# Altium PCB 3S2P-6V.PcbDoc
Units mm, origin at the board's own origin, x right, y up, seen from the top; angles counter-clockwise.
Board outline 74.99 x 72.5 mm, 2 copper layers (Top Layer, Bottom Layer); 8 components, 8 nets, 24 pads, 0 vias.
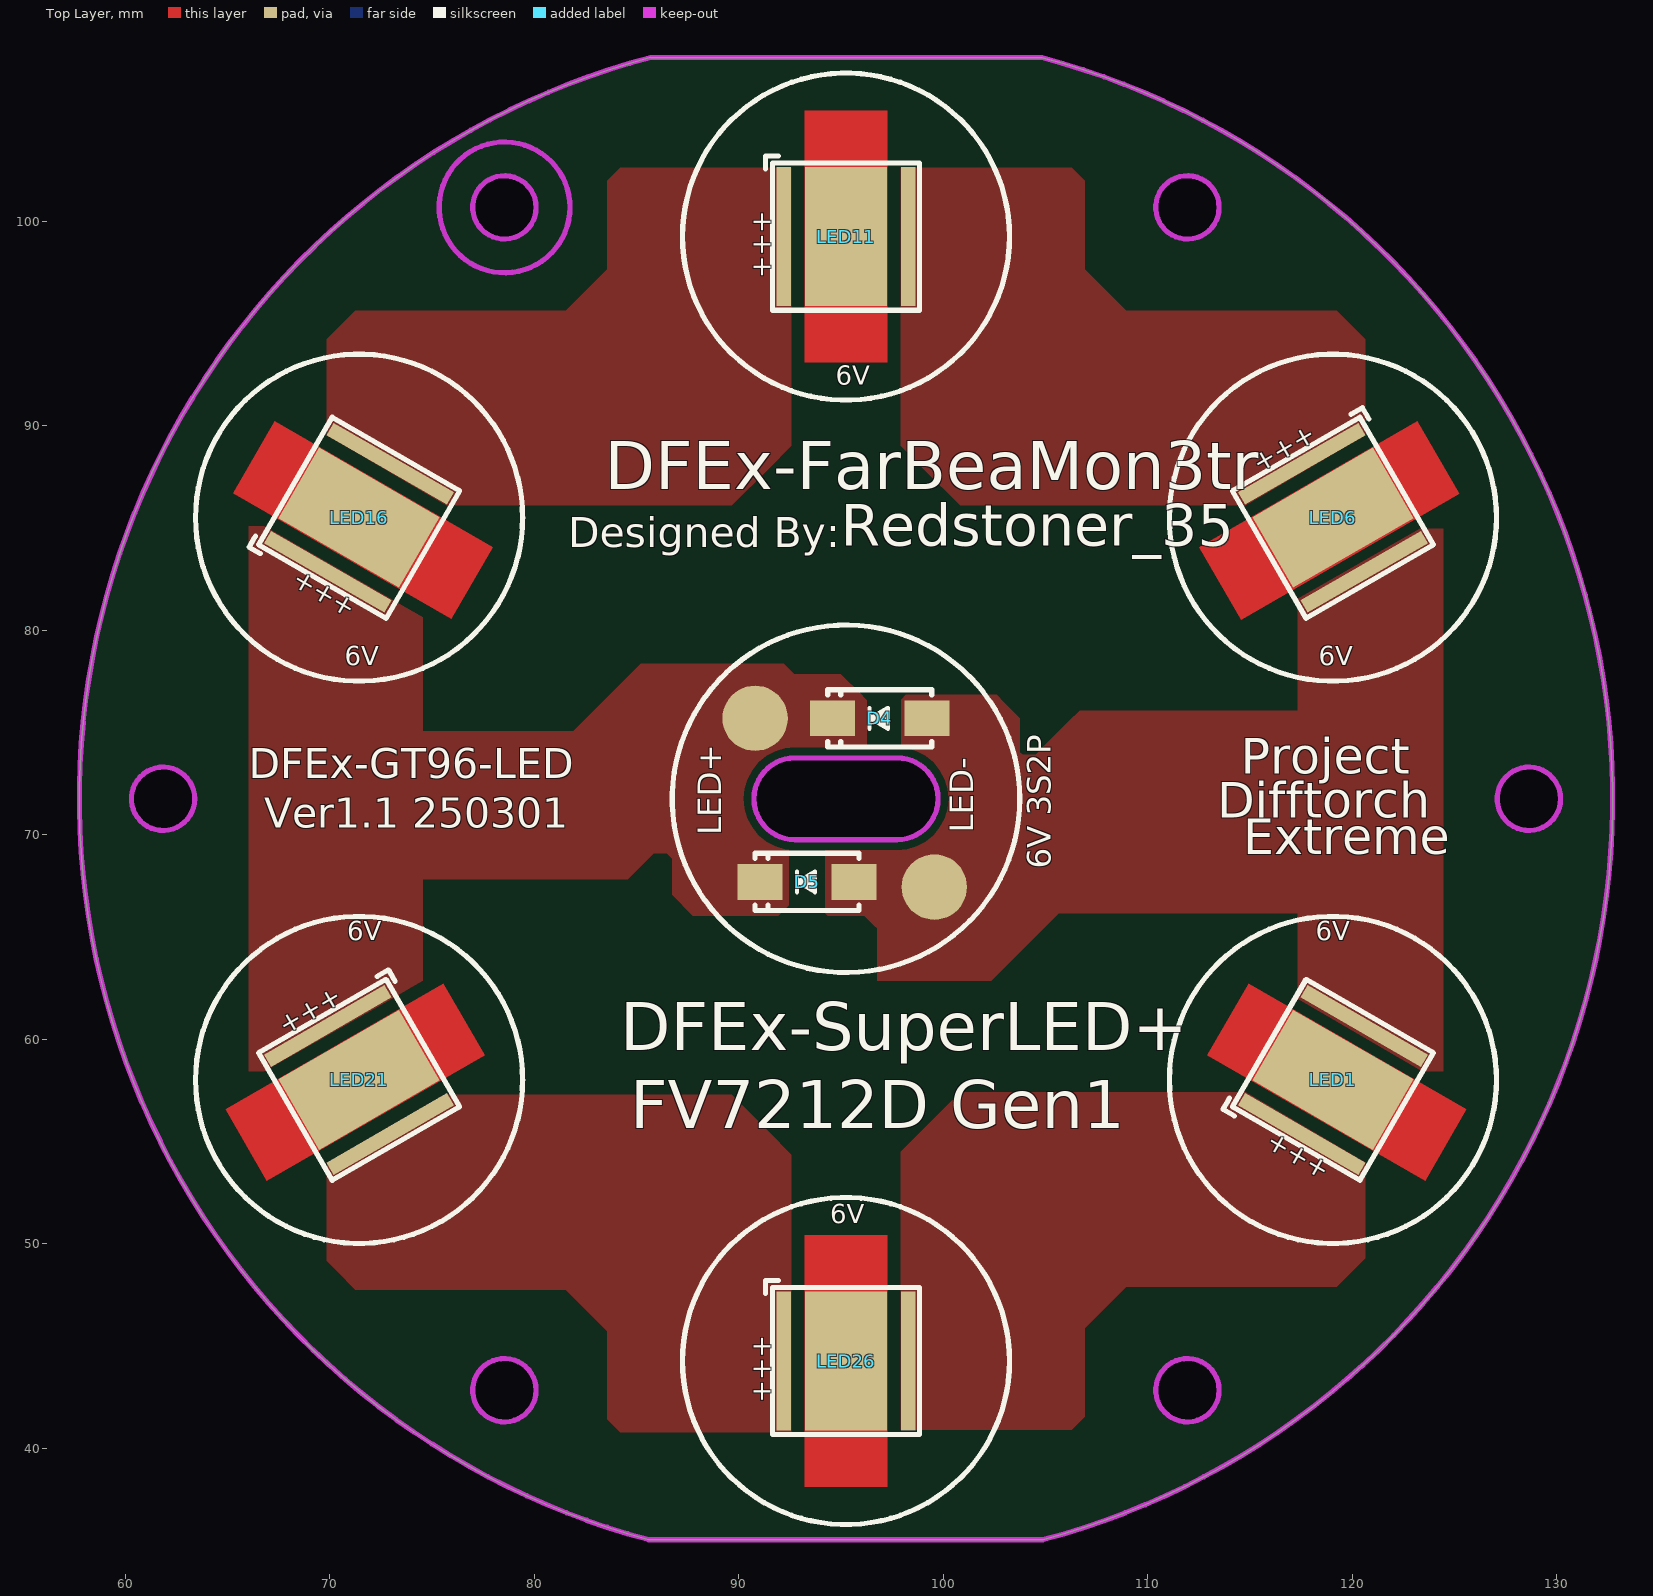
[diagram p0: Top Layer view]
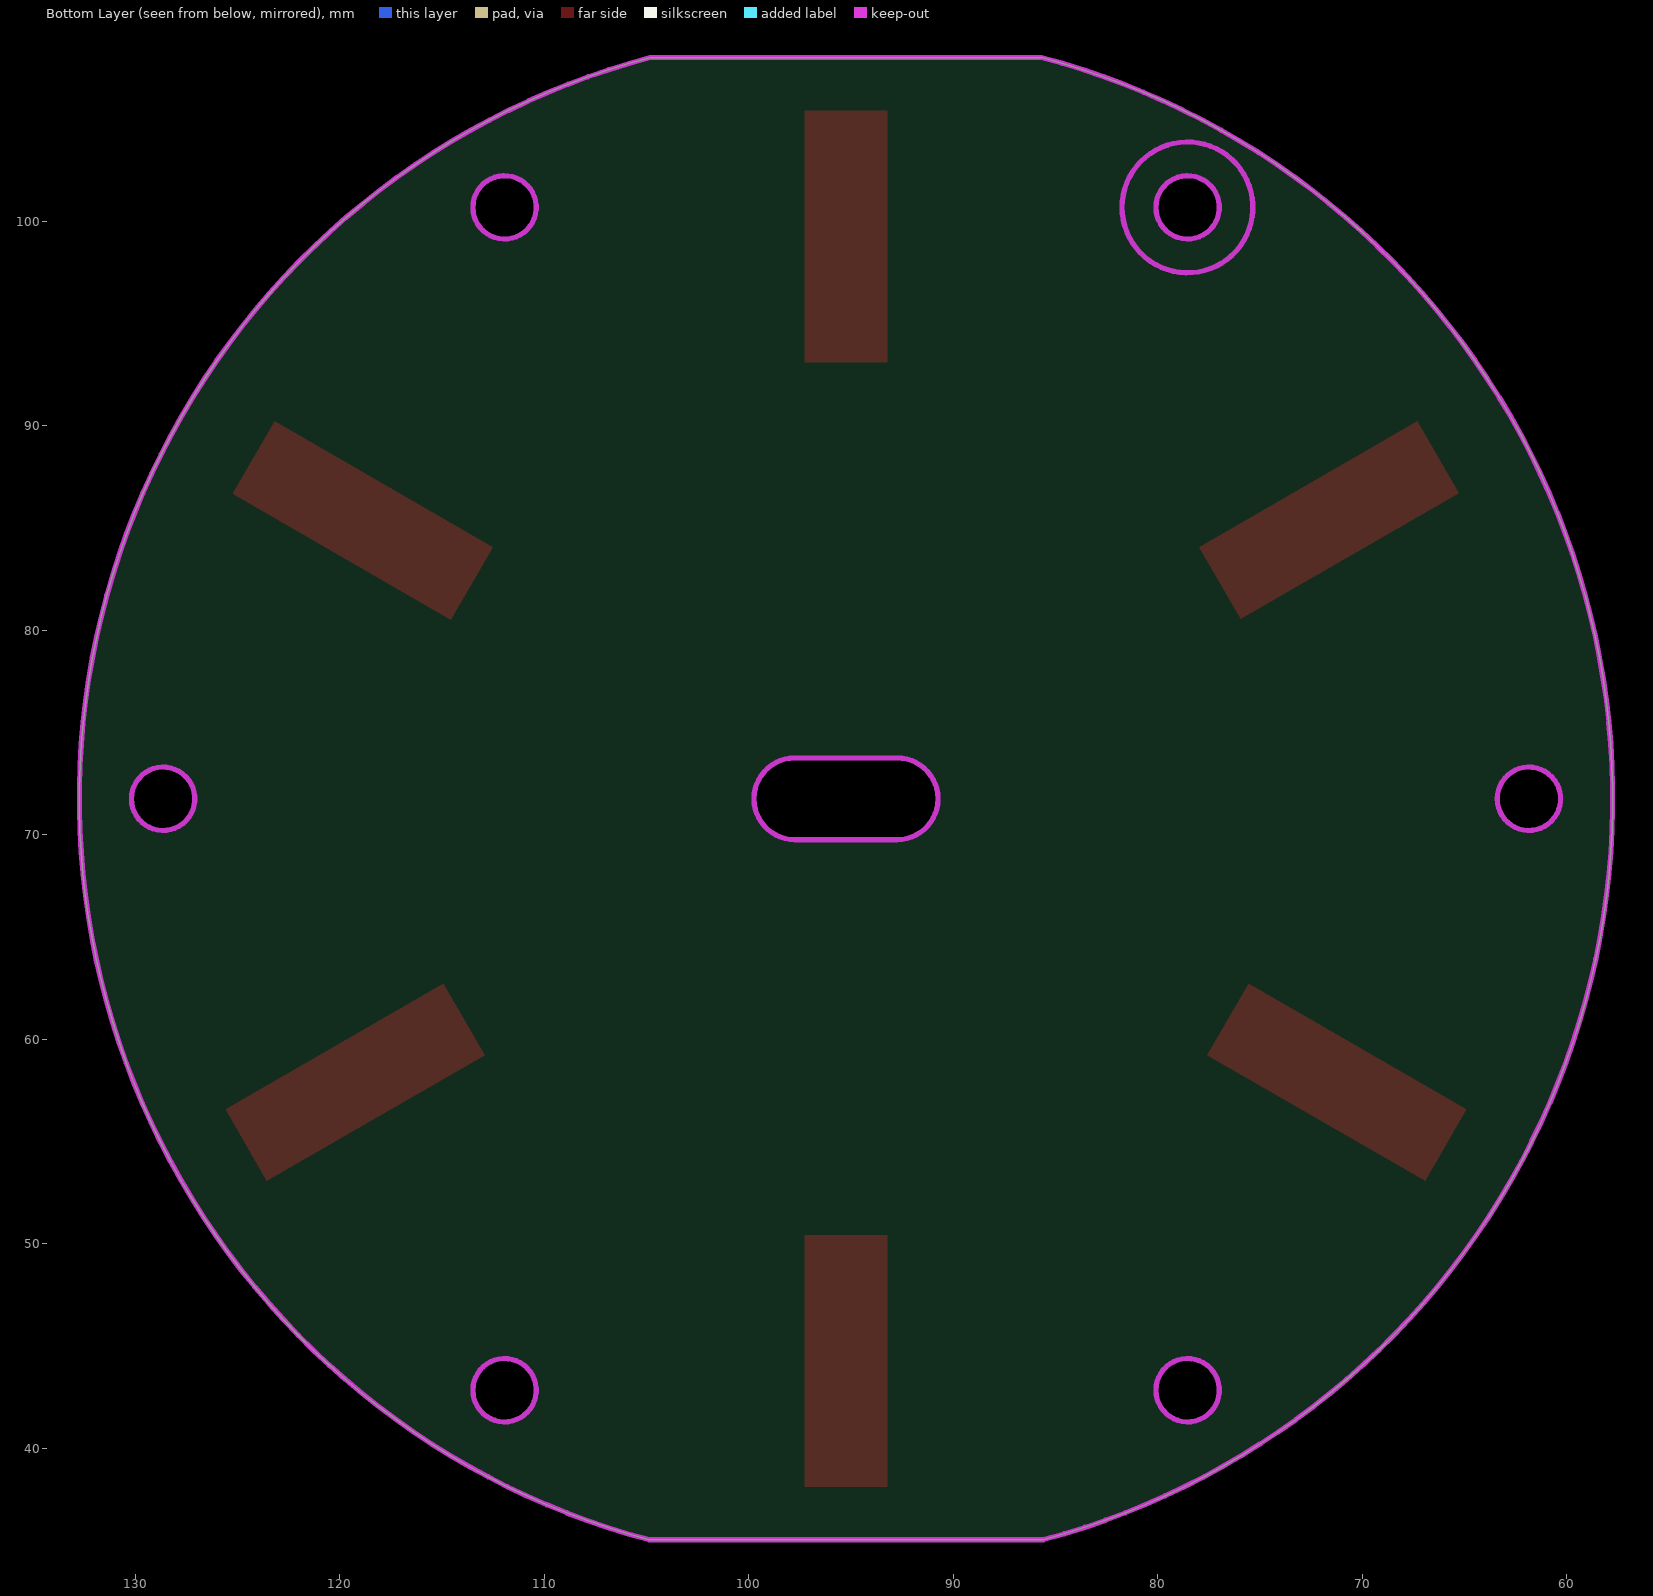
[diagram p1: Bottom Layer view, seen from below]

## Layer stack, top to bottom
Top Solder: solder mask 0.0102, Solder Resist, Dk 3.5
Top Layer: signal copper 0.0356
Dielectric 1: dielectric 0.32, FR-4, Dk 4.8
Bottom Layer: signal copper 0.0356
Bottom Solder: solder mask 0.0102, Solder Resist, Dk 3.5

## Board outline
85.597,35.519 cw(c95.25,71.755) 85.7,108.019 85.7,108.01 104.832,108.01 cw(c95.25,71.755) 104.888,35.515
cut-out: 76.999,42.828 cw(c78.549,42.828) 78.549,44.378 cw(c78.549,42.828) 80.099,42.828 cw(c78.549,42.828) 78.549,41.278 cw(c78.549,42.828)
cut-out: 110.401,42.828 ccw(c111.951,42.828) 111.951,41.278 ccw(c111.951,42.828) 113.501,42.828 ccw(c111.951,42.828) 111.951,44.378 ccw(c111.951,42.828)
cut-out: 127.102,71.755 ccw(c128.652,71.755) 128.652,70.205 ccw(c128.652,71.755) 130.202,71.755 ccw(c128.652,71.755) 128.652,73.305 ccw(c128.652,71.755)
cut-out: 110.401,100.682 ccw(c111.951,100.682) 111.951,99.132 ccw(c111.951,100.682) 113.501,100.682 ccw(c111.951,100.682) 111.951,102.232 ccw(c111.951,100.682)
cut-out: 78.549,99.132 cw(c78.549,100.682) 76.999,100.682 cw(c78.549,100.682) 78.549,102.232 cw(c78.549,100.682) 80.099,100.682 cw(c78.549,100.682)
cut-out: 61.848,70.205 cw(c61.848,71.755) 60.298,71.755 cw(c61.848,71.755) 61.848,73.305 cw(c61.848,71.755) 63.398,71.755 cw(c61.848,71.755)
cut-out: 92.75,69.755 97.75,69.755 ccw(c97.75,71.755) 97.75,73.755 92.75,73.755 ccw(c92.75,71.755)

## Design rules (kind name [scope] priority, off if disabled: settings)
Clearance [All] p1: gap=0.381
PolygonConnect [All] p1: connectstyle=Direct reliefconductorwidth=0.254 reliefentries=4 polygonreliefangle="90 Angle" airgapwidth=0.254
RoutingVias [All] p1: holewidth=0.711 width=1.27 viastyle="Through Hole" minholewidth=0.711 minwidth=1.27 maxholewidth=0.711 maxwidth=1.27
SolderMaskExpansion [All] p1: expansion=0.102
Width [All] p1: maxlimit=0.254 minlimit=0.254 preferedwidth=0.254
30 further rules are at their usual default settings.

## Components (designator, comment, footprint, x,y, rotation, side; value= is the part's Value field where it differs from the comment)
D4 "SB2060L" SMA 96.901,75.692 r180 top
D5 "SB2060L" SMA 93.345,67.691 r180 top
LED1 "FV7012I" XHP70.3HI 119.066,58.005 r240 top
LED6 "FV7012I" XHP70.3HI 119.066,85.505 r120 top
LED11 "FV7012I" XHP70.3HI 95.25,99.255 r180 top locked
LED16 "FV7012I" XHP70.3HI 71.434,85.505 r240 top locked
LED21 "FV7012I" XHP70.3HI 71.434,58.005 r120 top
LED26 "FV7012I" XHP70.3HI 95.25,44.255 r180 top locked

## Footprints (in the part's own frame and the unit in brackets; to place one, negate y for a bottom-side part, rotate by r counter-clockwise, add the part's x,y. Pads: shape width x height; smd on the part's side, far side on the other; paste and mask are expansions set on the pad)
SMA [mm] "4.5x2.6*2.2mm（长宽高，不包括引脚）"
  rect 2.2x1.75 smd: 1(-2.3,0) 2(2.3,0)
  silkscreen extent -2.54,-1.4 2.54,1.4, body extent -2.53,-1.3 2.58,1.3, height 2.15
XHP70.3HI [mm] "第三代CREE XHP70 LED，平头HI版本"
  rect 4x6.8 smd mask+0.03: 0(0,0)
  rect 0.7x6.8 smd mask+0.03: 1(-3.05,0) 2(3.05,0)
  silkscreen extent -3.6,-3.94 3.94,3.6

## Free pads (board coordinates)
  round 3.2 smd mask+0.03: 1(90.805,75.692) 2(99.568,67.437)

## Nets (pads, with @x,y where several pads share a name; then routed paths per layer and width w, separated by ;. In a path a pad name is that pad's centre, name@x,y a point inside that pad or via, vN(x,y) a via of type N, cw(c..) or ccw(c..) an arc to the next point about the centre after c; other vN are vias at no path point)
LED1P_6V: LED6.2 LED11.1
LED1P_12V: LED11.2 LED16.1
LED2P_6V: LED1.2 LED26.1
LED2P_12V: LED21.1 LED26.2
LED+: D4.2 D5.2 LED16.2 LED21.2 pad.1
LED-: D4.1 D5.1 LED1.1 LED6.1 pad.2
NTC+: 
NTC-: 
pads on no net: LED1.0 LED6.0 LED11.0 LED16.0 LED21.0 LED26.0

## Polygon pours and split planes (outlines as drawn)
LED+ on Top Layer "Component Side-No Net 1" (solid, remove dead copper, pour order 25): 94.996,77.851 96.012,76.835 96.139,76.708 96.266,76.581 96.266,73.755 96.266,70.358 95.504,69.596 95.345,69.755 92.837,69.755 92.837,69.723 92.456,69.342 92.456,68.199 92.456,66.548 91.948,66.04 88.646,66.04 87.757,66.04 86.741,67.056 86.741,68.58 86.741,68.834 86.487,69.088 85.344,69.088 85.344,72.136 85.09,72.39 85.979,73.279 85.979,77.851
LED- on Top Layer "Component Side-No Net 1" (solid, remove dead copper, pour order 23): 97.946,73.745 97.946,76.61 98.171,76.835 100.584,76.835 102.616,76.835 102.997,76.454 103.759,75.692 103.759,74.041 103.886,73.914 104.775,73.914 104.521,73.025 104.521,70.358 104.521,69.469 103.759,68.707 99.949,64.897 98.552,64.897 97.282,64.897 96.139,66.04 94.361,66.04 94.234,66.167 94.234,69.755 94.234,70.358 94.361,70.485 97.028,73.152 97.536,73.152
LED- on Top Layer "Component Side-No Net 1" (solid, remove dead copper, pour order 11): 123.317,84.963 124.46,84.963 124.46,77.851 124.46,58.42 123.444,58.42 117.348,61.976 117.348,81.534
LED- on Top Layer "Component Side-No Net 1" (solid, remove dead copper, pour order 12): 117.221,66.167 107.188,66.167 105.664,66.167 103.251,63.754 102.362,62.865 96.774,62.865 96.774,72.136 96.393,72.517 96.52,72.644 102.997,72.644 103.251,72.644 106.172,75.565 106.68,76.073 121.412,76.073 121.412,66.675 120.904,66.167
LED+ on Top Layer "Component Side-No Net 1" (solid, remove dead copper, pour order 13): 66.04,84.836 66.04,85.09 66.802,85.09 74.549,80.645 74.549,77.978 74.549,62.847 74.16,62.625 73.025,61.976 66.802,58.42 66.04,58.42
LED+ on Top Layer "Component Side-No Net 1" (solid, remove dead copper, pour order 14): 92.75,73.765 92.71,73.805 92.71,77.597 92.71,77.851 92.329,78.232 92.202,78.359 90.043,78.359 85.217,78.359 83.185,76.327 81.915,75.057 70.993,75.057 70.993,66.04 72.771,67.818 78.105,67.818 84.582,67.818 86.614,69.85 87.938,71.174 90.836,71.174
LED1P_6V on Top Layer "Component Side-No Net 1" (solid, remove dead copper, pour order 19): 97.917,102.616 97.917,89.027 99.06,87.884 100.838,86.106 114.808,86.106 120.65,89.535 120.65,92.583 120.65,94.107 120.65,94.234 120.142,94.742 119.253,95.631 116.205,95.631 108.966,95.631 106.934,97.663 106.934,101.473 106.934,101.981 106.299,102.616
LED2P_6V on Top Layer "Component Side-No Net 1" (solid, remove dead copper, pour order 18): 97.917,40.894 97.917,54.483 99.06,55.626 100.838,57.404 114.808,57.404 120.65,53.975 120.65,50.927 120.65,49.403 120.65,49.276 120.142,48.768 119.253,47.879 116.205,47.879 108.966,47.879 106.934,45.847 106.934,42.037 106.934,41.529 106.299,40.894
LED1P_12V on Top Layer "Component Side-No Net 1" (solid, remove dead copper, pour order 17): 92.583,102.616 92.583,89.027 91.44,87.884 89.662,86.106 75.692,86.106 69.85,89.535 69.85,92.583 69.85,94.107 69.85,94.234 70.358,94.742 71.247,95.631 74.295,95.631 81.534,95.631 83.566,97.663 83.566,101.473 83.566,101.981 84.201,102.616
LED2P_12V on Top Layer "Component Side-No Net 1" (solid, remove dead copper, pour order 16): 92.583,40.767 92.583,54.356 91.44,55.499 89.662,57.277 75.692,57.277 69.85,53.848 69.85,50.8 69.85,49.276 69.85,49.149 70.358,48.641 71.247,47.752 74.295,47.752 81.534,47.752 83.566,45.72 83.566,41.91 83.566,41.402 84.201,40.767

## Keep-outs
Keep-Out Layer:
  circle w0.254: c128.652,71.755 r1.55
  circle w0.254: c78.549,100.682 r3.2
  circle w0.254: c111.951,42.828 r1.55
  circle w0.254: c78.541,42.828 r1.55
  circle w0.254: c61.848,71.755 r1.55
  circle w0.254: c78.541,100.682 r1.55
  circle w0.254: c111.951,100.682 r1.55
  lines w0.254: 85.597,35.515 104.888,35.515 ccw(c95.25,71.755) 104.832,108.01 85.7,108.01 ; 85.597,35.519 cw(c95.25,71.755) 85.7,108.019 ; 92.75,69.755 cw(c92.75,71.755) 92.75,73.755 97.75,73.755 cw(c97.75,71.755) 97.75,69.755 92.75,69.755

## Other copper
Top Layer:
  rectangle: 93.218,93.091 97.282,105.41
  rectangle: 93.218,38.091 97.282,50.41
  region: 67.309,90.233 65.271,86.703 75.94,80.544 77.978,84.074
  region: 114.941,62.733 112.907,59.211 123.576,53.052 125.609,56.574
  region: 112.522,84.074 114.583,80.503 125.252,86.663 123.191,90.234
  region: 64.891,56.574 66.924,53.052 77.593,59.211 75.559,62.734

## Silkscreen, mask and mechanical layers (free items; w line width, h text height)
Top Overlay:
  circle w0.254: c95.25,71.755 r8.5
  circle w0.254: c71.434,85.505 r8
  circle w0.254: c71.434,58.005 r8
  circle w0.254: c95.25,44.255 r8
  circle w0.254: c119.066,58.005 r8
  circle w0.254: c119.066,85.505 r8
  circle w0.254: c95.25,99.255 r8
  text "6V" at 94.742,91.694 h1.6
  text "DFEx-FarBeaMon3tr" at 83.439,86.106 h4
  text "Designed By:" at 81.661,83.566 h2.5
  text "Redstoner_35" at 94.996,83.439 h3.5
  text "6V" at 70.739,77.978 h1.6
  text "6V" at 118.364,77.978 h1.6
  text "Project" at 114.554,72.39 h3
  text "DFEx-GT96-LED" at 66.04,72.263 h2.5
  text "Difftorch" at 113.411,70.231 h3
  text "LED-" at 101.854,70.104 h2 r90
  text "LED+" at 89.535,69.977 h2 r90
  text "Ver1.1 250301" at 66.802,69.85 h2.5
  text "Extreme" at 114.681,68.453 h3
  text "6V 3S2P" at 105.664,68.326 h2 r90
  text "6V" at 70.866,64.516 h1.6
  text "6V" at 118.237,64.516 h1.6
  text "DFEx-SuperLED+" at 84.201,58.674 h4
  text "FV7212D Gen1" at 84.709,54.864 h4
  text "6V" at 94.488,50.673 h1.6
Top Solder:
  rectangle: 94.361,103.886 96.266,104.775
  rectangle: 94.488,93.472 96.393,94.361
  rectangle: 94.488,38.472 96.393,39.361
  rectangle: 94.361,48.886 96.266,49.775
  region: 76.192,83.883 75.24,82.234 76.01,81.789 76.962,83.439
  region: 67.239,89.089 66.286,87.44 67.056,86.995 68.009,88.645
  region: 114.87,61.589 113.918,59.94 114.687,59.495 115.64,61.145
  region: 123.824,56.383 122.871,54.734 123.641,54.289 124.593,55.939
  region: 74.86,61.145 75.813,59.495 76.582,59.94 75.63,61.589
  region: 65.907,55.939 66.859,54.289 67.629,54.734 66.676,56.383
  region: 122.491,88.645 123.444,86.995 124.214,87.44 123.261,89.089
  region: 113.538,83.439 114.49,81.789 115.26,82.234 114.308,83.883
Mechanical 1:
  circle w0.254: c128.652,71.755 r3.2
  circle w0.254: c111.951,42.828 r3.2
  circle w0.254: c78.549,42.828 r3.2
  circle w0.254: c61.848,71.755 r3.2
  circle w0.254: c111.951,100.682 r3.2

## Text inside footprints (layer, text, board x,y; h text height)
LED1: Top Overlay "+++" at 115.553,54.461 h1.65 r330
LED6: Top Overlay "+++" at 117.753,90.319 h1.65 r210
LED11: Top Overlay "+++" at 90.424,100.525 h1.65 r270
LED16: Top Overlay "+++" at 67.921,81.961 h1.65 r330
LED21: Top Overlay "+++" at 70.121,62.819 h1.65 r210
LED26: Top Overlay "+++" at 90.424,45.525 h1.65 r270